# EAGLE board controller (EAGLE 7.5.0)
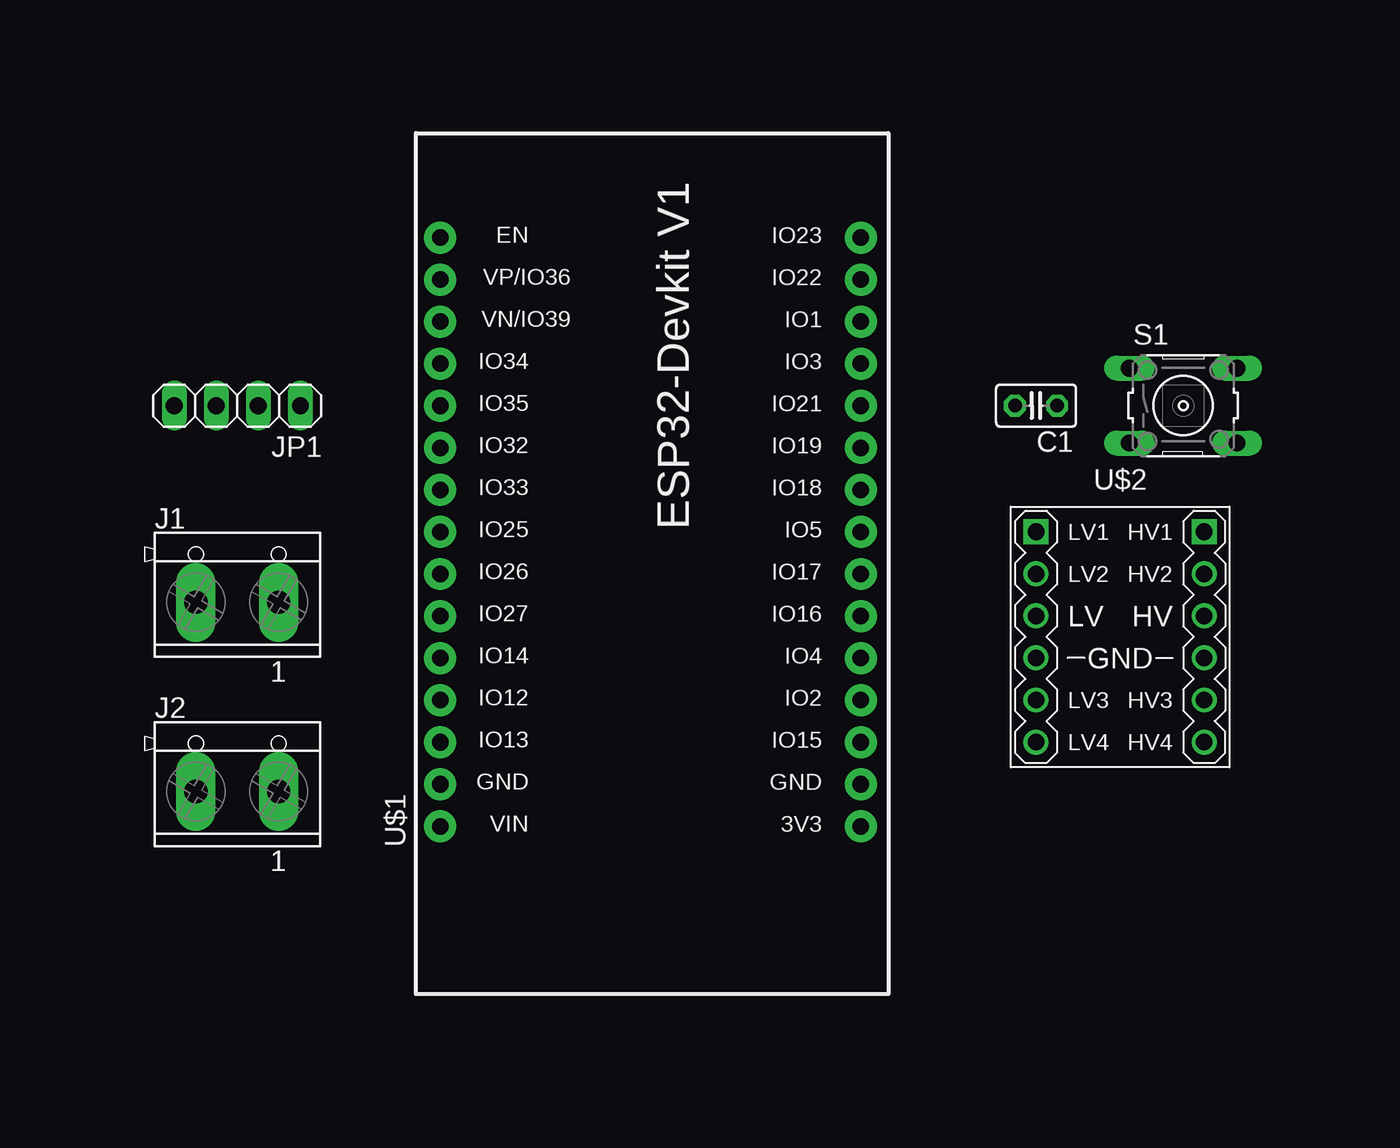
[diagram p0: board, top side]
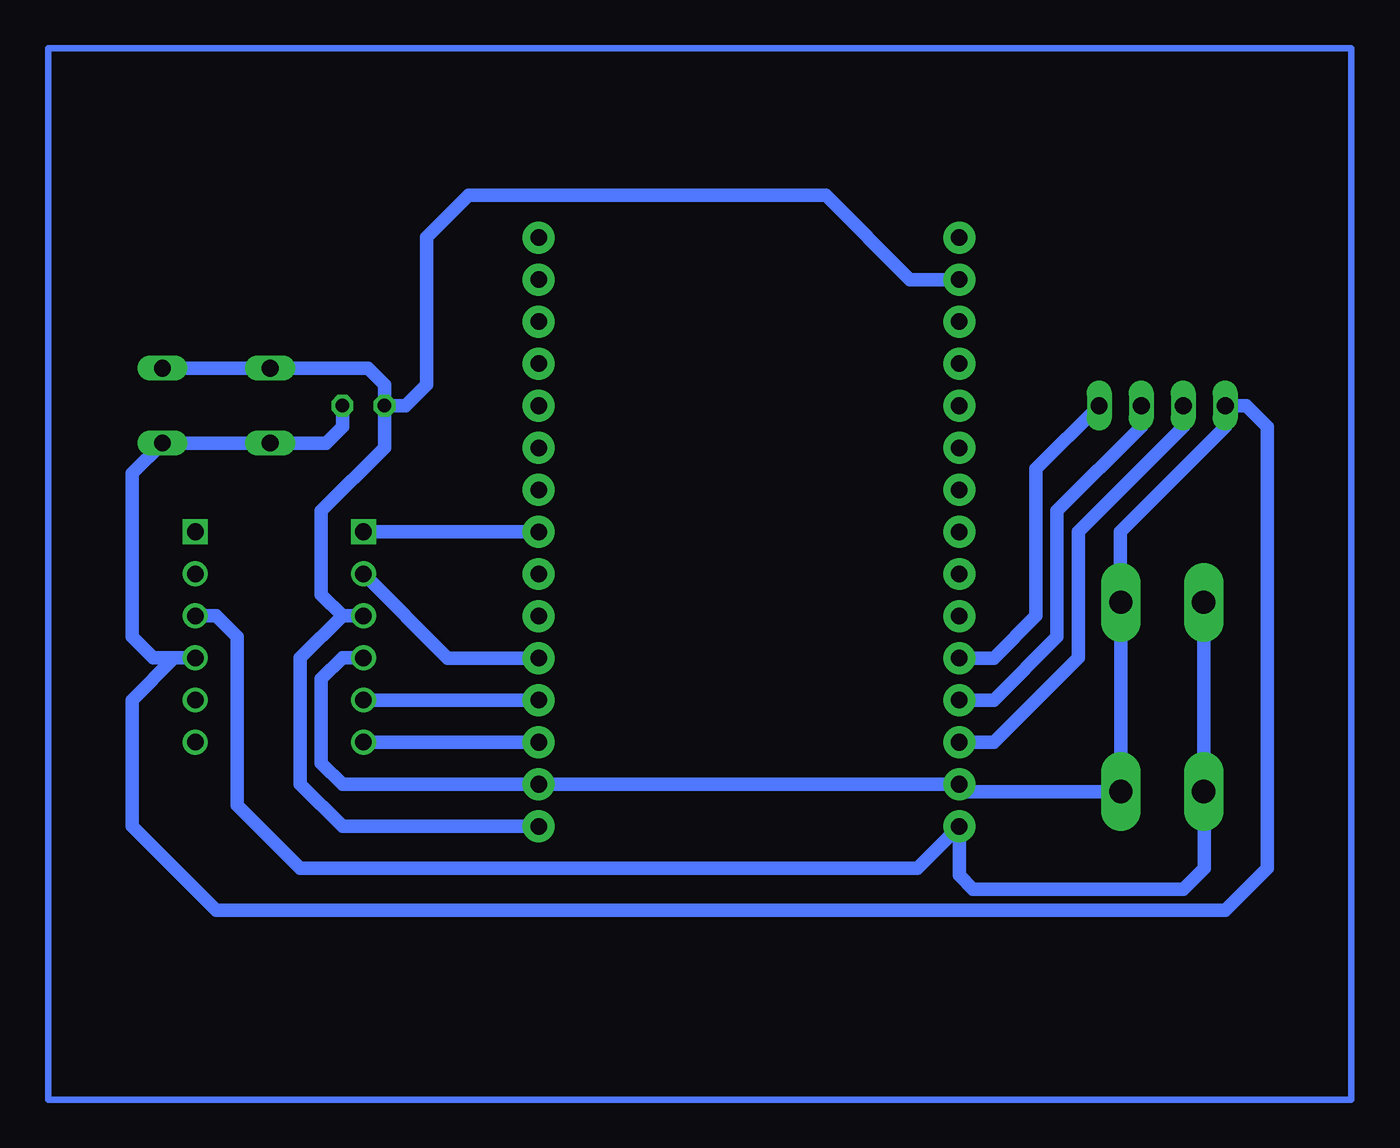
[diagram p1: board, bottom side, seen from below]

No outline drawn. Coordinates in mm, seen from the top.
Copper layers (1*16): Top 0.035mm / dielectric 1.5mm / Bottom 0.035mm
Design rules "default": minimum track width 6mil, minimum drill 0.35mm, track to track 6mil, track to pad 6mil, pad to pad 6mil, via to via 6mil, smd to smd 6mil, copper to edge 40mil, drill to drill 6mil, minimum pad ring 10mil, minimum via ring 8mil, stop-mask expansion 4mil, vias tented up to drill 0mil, thermal gap 10mil

## Footprints (pad centres in the part's own frame; a part is rotated, then mirrored left to right if it is on the bottom)
C025-025X050 = drill 0.813 octagon: 1 -1.27,0; 2 1.27,0
TERMINAL_BLOCK_2P_5 = drill 1.4 pad 2.38 long: 1 2.5,-0.45; 2 -2.5,-0.45
1X04 = drill 1.016 long: 1 -3.81,0; 2 -1.27,0; 3 1.27,0; 4 3.81,0
B3F-10XX = drill 1.016 long: 1 -3.251,2.261; 2 3.251,2.261; 3 -3.251,-2.261; 4 3.251,-2.261
ESP32-DEVKITV1 = drill 1 pad 1.93: 3V3 -16.52,-12.27; D1 13.96,-12.27; D2 -8.9,-12.27; D3 11.42,-12.27; D4 -6.36,-12.27; D5 1.26,-12.27; D12 -8.9,13.135; D13 -11.44,13.135; D14 -6.36,13.135; D15 -11.44,-12.27; D16 -3.82,-12.27; D17 -1.28,-12.27; D18 3.8,-12.27; D19 6.34,-12.27; D21 8.88,-12.27; D22 16.5,-12.27; D23 19.04,-12.27; D25 1.26,13.135; D26 -1.28,13.135; D27 -3.82,13.135; D32 6.34,13.135; D33 3.8,13.135; D34 11.42,13.135; D35 8.88,13.135; D36 16.5,13.135; D39 13.96,13.135; EN 19.04,13.135; GND@1 -13.98,13.135; GND@2 -13.98,-12.27; VIN -16.52,13.135
LEVEL-SHIFTER-4CH = drill 1 square: J1.1 -5.08,6.35; J2.1 5.08,6.35 | drill 1: J1.2 -5.08,3.81; J1.3 -5.08,1.27; J1.4 -5.08,-1.27; J1.5 -5.08,-3.81; J1.6 -5.08,-6.35; J2.2 5.08,3.81; J2.3 5.08,1.27; J2.4 5.08,-1.27; J2.5 5.08,-3.81; J2.6 5.08,-6.35

## Placement (x,y rotation side)
C1  [C025-025X050]  74.93,45.72 180 top
J1  CON_TERMINAL_BLOCK_02-5MM  [TERMINAL_BLOCK_2P_5]  26.67,34.29 0 top
J2  CON_TERMINAL_BLOCK_02-5MM  [TERMINAL_BLOCK_2P_5]  26.67,22.86 0 top
JP1  [1X04]  26.67,45.72 180 top
S1  [B3F-10XX]  83.82,45.72 0 top
U$1  ESP32DEVKITV1  [ESP32-DEVKITV1]  52.07,36.83 90 top
U$2  LEVEL-SHIFTER-4CH  [LEVEL-SHIFTER-4CH]  80.01,31.75 0 top

## Library data of the parts
C1 = rcl; SPICEPREFIX: C
J1 J2 = tblok
JP1 = pinhead
S1 = switch-omron; MPN: B3F-1000; OC_FARNELL: 176432; OC_NEWARK: 36M3542
U$1 = esp32-devkitv1
U$2 = diy-model

## Nets
GND: C1.1 J1.1 J2.1 JP1.4 S1.3 S1.4 U$1.GND@1 U$1.GND@2 U$2.J1.4 U$2.J2.4
HV: J1.2 J2.2 U$1.VIN U$2.J2.3
LV: C1.2 S1.1 S1.2 U$1.3V3 U$1.D36 U$2.J1.3
LV1: U$1.D5 U$2.J1.1
LV2: U$1.D4 U$2.J1.2
LV3: U$1.D2 U$2.J1.5
LV4: U$1.D15 U$2.J1.6
OUT1: JP1.1 U$1.D14
OUT2: JP1.2 U$1.D12
OUT3: JP1.3 U$1.D13

## Tracks (layer width: path | path; a pad name or v marks a point on that pad's centre or on a via)
GND
  Bottom 0.813: C1.1 76.2,44.45 77.19,43.46 S1.3 S1.4 88.9,41.63 88.9,31.75 87.63,30.48 U$2.J2.4 86.36,30.48 88.9,27.94 88.9,20.32 83.82,15.24 22.86,15.24 20.32,17.78 20.32,44.45 21.59,45.72 JP1.4 22.86,44.45 29.21,38.1 29.21,33.88 J1.1 29.17,22.9 29.21,22.86 29.21,22.45 J2.1 38.49,22.41 U$1.GND@1 U$1.GND@2 76.2,22.86 77.47,24.13 77.47,29.21 76.2,30.48 U$2.J1.4
HV
  Bottom 0.813: J1.2 J2.2 24.13,22.37 24.13,17.78 25.4,16.51 38.1,16.51 38.94,17.34 U$1.VIN 41.47,17.78 78.74,17.78 82.55,21.59 82.55,31.75 83.82,33.02 U$2.J2.3
LV
  Bottom 0.813: S1.2 S1.1 74.65,47.98 73.66,46.99 C1.2 | U$1.D36 41.9,53.33 46.99,58.42 68.58,58.42 71.12,55.88 71.12,46.99 72.39,45.72 C1.2 | 76.2,33.02 77.47,34.29 77.47,39.37 73.66,43.18 C1.2 | U$2.J1.3 76.2,33.02 | 76.2,33.02 78.74,30.48 78.74,22.86 76.19,20.31 U$1.3V3
LV1
  Bottom 0.813: U$1.D5 U$2.J1.1
LV2
  Bottom 0.813: U$1.D4 69.84,30.47 U$2.J1.2
LV3
  Bottom 0.813: U$2.J1.5 U$1.D2
LV4
  Bottom 0.813: U$1.D15 U$2.J1.6
N$1
  Bottom 0.406: 16.51,3.81 93.98,3.81 93.98,67.31 15.24,67.31 15.24,3.81 16.51,3.81
OUT1
  Bottom 0.813: U$1.D14 36.84,30.47 34.29,33.02 34.29,41.91 JP1.1
OUT2
  Bottom 0.813: JP1.2 27.94,44.45 33.02,39.37 33.02,31.75 36.84,27.93 U$1.D12
OUT3
  Bottom 0.813: JP1.3 25.4,44.45 31.75,38.1 31.75,30.48 36.84,25.39 U$1.D13